# Altium PCB TMP_STM8_LCD.PcbDoc
Units mil, origin at the board's own origin, x right, y up, seen from the top; angles counter-clockwise.
Board outline 6000 x 4000 mil, 2 copper layers (Top Layer, Bottom Layer); 21 components, 16 nets, 71 pads, 27 vias.
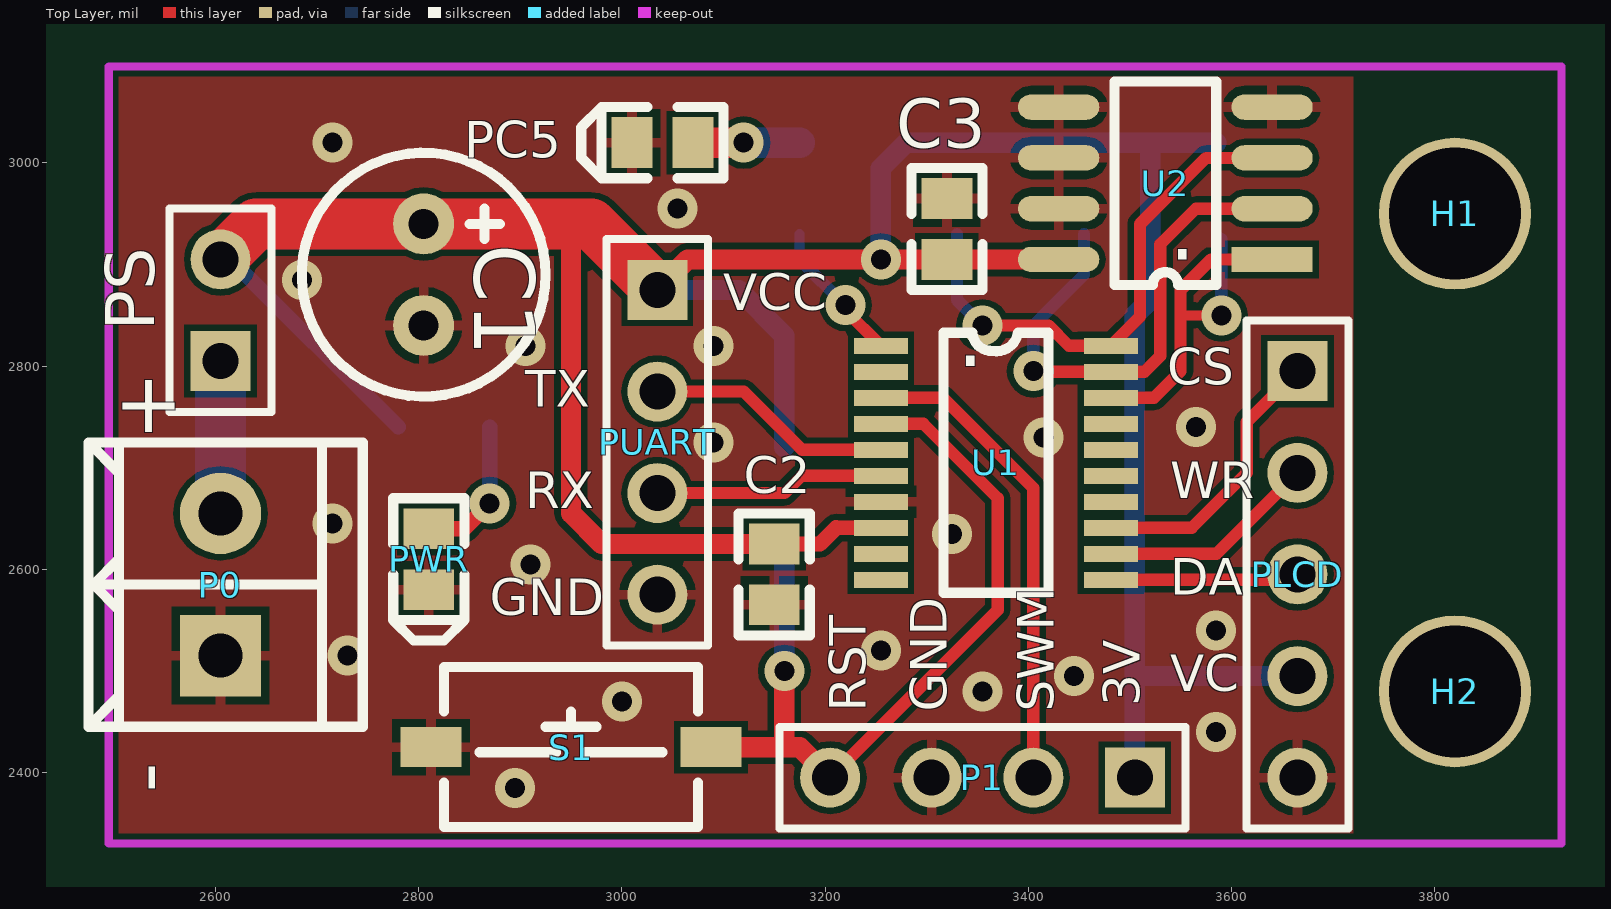
[diagram p0: Top Layer view]
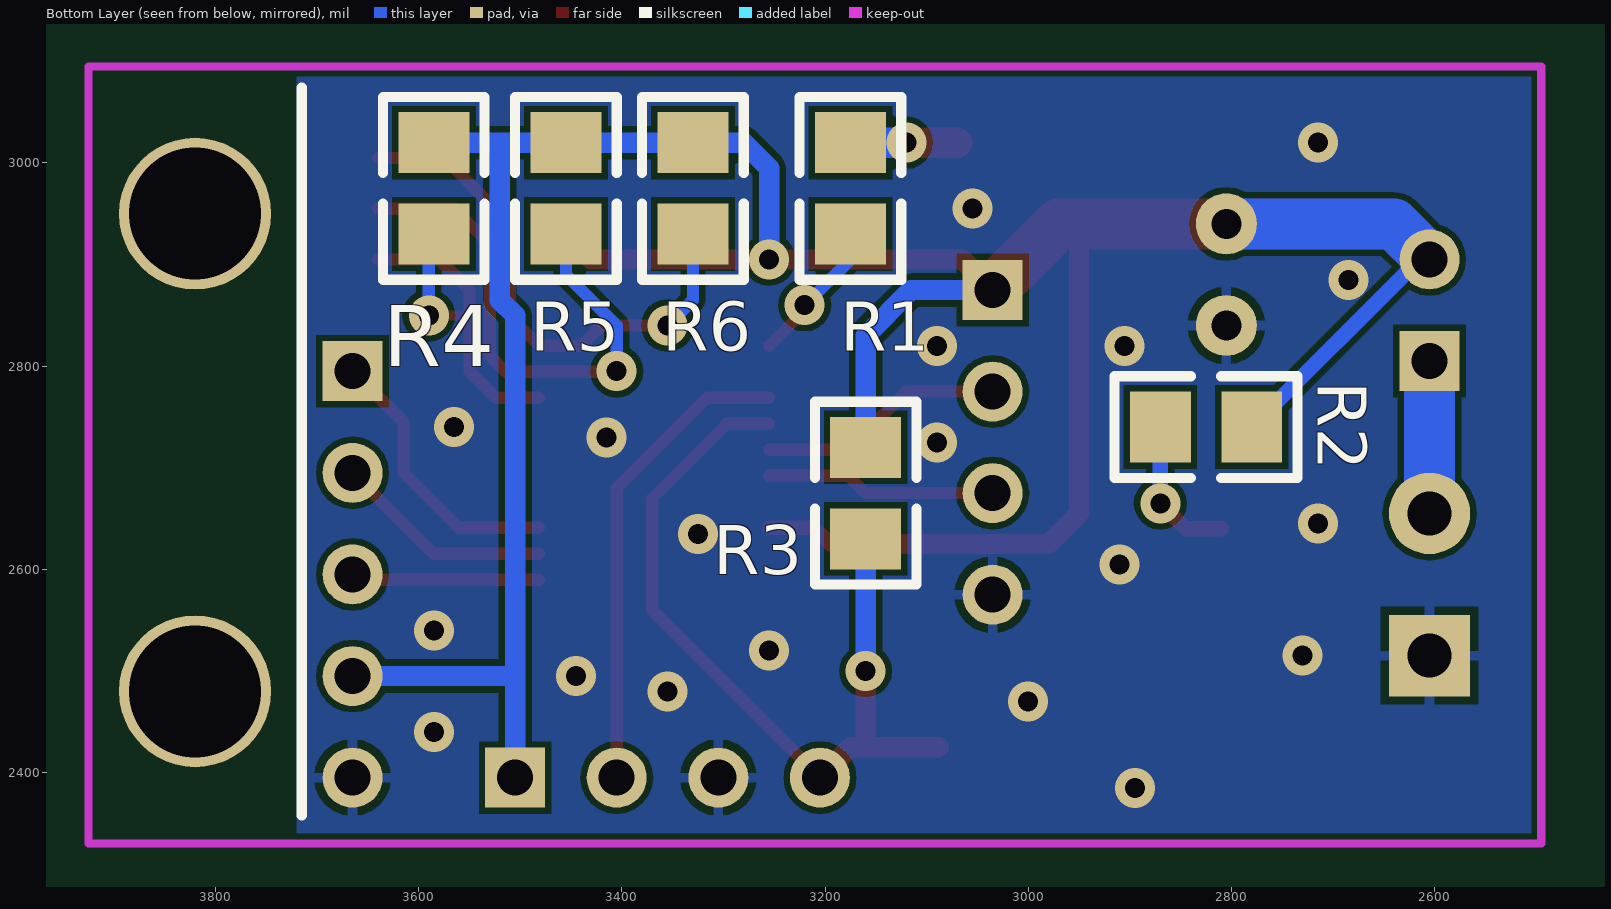
[diagram p1: Bottom Layer view, seen from below]

## Layer stack, top to bottom
Top Solder: solder mask 0.4, Solder Resist, Dk 3.5
Top Layer: signal copper 1.4
Dielectric 1: dielectric 12.6, FR-4, Dk 4.8
Bottom Layer: signal copper 1.4
Bottom Solder: solder mask 0.4, Solder Resist, Dk 3.5

## Board outline
1000,1000 7000,1000 7000,5000 1000,5000

## Design rules (kind name [scope] priority, off if disabled: settings)
Clearance [All] p1: gap=6
PolygonConnect PolygonConnect_1 [All vs IsVia] p1: connectstyle=Direct reliefconductorwidth=10 reliefentries=4 polygonreliefangle="90 Angle" airgapwidth=10
PolygonConnect [All] p2: connectstyle=Relief reliefconductorwidth=10 reliefentries=4 polygonreliefangle="90 Angle" airgapwidth=8
RoutingVias [All] p1: holewidth=23.62 width=47.24 viastyle="Through Hole" minholewidth=11.81 minwidth=23.62 maxholewidth=39.37 maxwidth=70.87
SolderMaskExpansion [All] p1: expansion=4
Width [All] p1: maxlimit=100 minlimit=10 preferedwidth=10 minimp=50.000000 maximp=50.000000 favimp=50.000000
30 further rules are at their usual default settings.

## Components (designator, comment, footprint, x,y, rotation, side; value= is the part's Value field where it differs from the comment)
C1 "Cap Pol2" CapPol5_11 2805,2890 r270 top
C2 "Cap" 0603_LMH 3150,2595 r90 top
C3 "Cap" 0603_LMH 3320,2935 r270 top
H1 "Plug" OriginHole#1 3830,2725 r0 top
H2 "Plug" OriginHole#2 3820,2485 r0 top
P0 "Header 2" KF350-2P 2605,2585 r90 top
P1 "Header 4" HDR1X4 3505,2395 r180 top
PC5 "LED" 0603_LMH 3040,3020 r180 top (schematic designator D1)
PLCD "Header 5" HDR1X5 3665,2795 r270 top
PS "Header 2" HDR1X2 2605,2805 r90 top
PUART "Header 4" HDR1X4 3035,2875 r270 top
PWR "LED" 0603_LMH 2810,2610 r270 top (schematic designator D2)
R1 "Res2" 0805 3175,2975 r270 bottom
R2 "Res2" 0805 2825,2740 r180 bottom
R3 "Res2" 0805 3160,2675 r90 bottom
R4 "Res2" 0805 3585,2975 r90 bottom
R5 "Res2" 0805 3455,2975 r90 bottom
R6 "Res2" 0805 3330,2975 r90 bottom
S1 "SW-PB" SW-3X6X2.5 2950,2425 r0 top
U1 "STM8L051F3" TSSOP20 3255,2820 r0 top
U2 "LM75" SOP8 3640,2905 r180 top

## Footprints (in the part's own frame and the unit in brackets; to place one, negate y for a bottom-side part, rotate by r counter-clockwise, add the part's x,y. Pads: shape width x height; smd on the part's side, far side on the other; paste and mask are expansions set on the pad)
0603_LMH [mil]
  rect 40x50 smd: 1(-30,0) 2(30,0)
  silkscreen extent -60,-35 60,35
0805 [mil]
  rect 60x70 smd: 1(-45,0) 2(45,0)
  silkscreen extent -90,-50 90,50
CapPol5_11 [mil] "Cap Pol 5*11mm"
  round 60 hole 29.53: 1(-50,0) 2(50,0)
  silkscreen extent -120,-120 120,120
HDR1X2 [mm] "Connector; Header; 2 Position"
  rect 1.5x1.5 hole 0.9: 1(0,0)
  round 1.5 hole 0.9: 2(2.54,0)
  silkscreen extent -1.27,-1.27 3.81,1.27
HDR1X4 [mm] "Connector; Header; 4 Position"
  rect 1.5x1.5 hole 0.9: 1(0,0)
  round 1.5 hole 0.9: 2(2.54,0) 3(5.08,0) 4(7.62,0)
  silkscreen extent -1.27,-1.27 8.89,1.27
HDR1X5 [mm] "Connector; Header; 5 Position"
  rect 1.5x1.5 hole 0.9: 1(0,0)
  round 1.5 hole 0.9: 2(2.54,0) 3(5.08,0) 4(7.62,0) 5(10.16,0)
  silkscreen extent -1.27,-1.27 11.43,1.27
KF350-2P [mil]
  rect 80x80 hole 43.31: 1(-70,0)
  round 80 hole 43.31: 2(70,0)
  silkscreen extent -140,-140 140,130
OriginHole#1 [mm]
  round 3.8 hole 3.3: 0(-0.254,5.715)
OriginHole#2 [mm]
  round 3.8 hole 3.3: 0(0,-0.127)
SOP8 [mil]
  rect 80x25 smd: 1(0,0)
  oval 80x25 smd: 2(0,-50) 3(0,-100) 4(0,-150) 5(210,-150) 6(210,-100) 7(210,-50) 8(210,0)
  silkscreen extent 55,-175 155,25
SW-3X6X2.5 [mm]
  rect 1.524x1 smd: 1(-3.5,0) 2(3.5,0)
  silkscreen extent -3.17,-2 3.17,2
TSSOP20 [mm]
  rect 1.35x0.4 smd: 1(0,0) 2(0,-0.65) 3(0,-1.3) 4(0,-1.95) 5(0,-2.6) 6(0,-3.25) 7(0,-3.9) 8(0,-4.55) 9(0,-5.2) 10(0,-5.85) 11(5.75,-5.85) 12(5.75,-5.2) 13(5.75,-4.55) 14(5.75,-3.9) 15(5.75,-3.25) 16(5.75,-2.6) 17(5.75,-1.95) 18(5.75,-1.3) 19(5.75,-0.65) 20(5.75,0)
  silkscreen extent 1.56,-6.18 4.19,0.33

## Part data
C1: "Polarized Capacitor (Axial)"
C2 C3: "Capacitor"
P0 PS: "Header, 2-Pin"
P1 PUART: "Header, 4-Pin"
PC5 PWR: library part LED0, "Typical INFRARED GaAs LED"
PLCD: "Header, 5-Pin"
R1 R2 R3 R4 R5 R6: "Resistor"
S1: "Switch"

## Via types
v1: diameter 39.37, hole 19.68, Top Layer to Bottom Layer, 27 vias

## Nets (pads, with @x,y where several pads share a name; then routed paths per layer and width w, separated by ;. In a path a pad name is that pad's centre, name@x,y a point inside that pad or via, vN(x,y) a via of type N, cw(c..) or ccw(c..) an arc to the next point about the centre after c; other vN are vias at no path point)
CS: PLCD.1 U1.13 | length 276.8
  Top Layer w12: U1.13 3560.87,2640.87 3615,2695 3615,2745 PLCD.1
DA: PLCD.3 U1.11 | length 185.8
  Top Layer w10: PLCD.3@3659.68,2589.68 PLCD.3
  Top Layer w12: U1.11 PLCD.3@3659.68,2589.68
GND: C1.2 C2.1 C3.1 P0.1 P1.3 PC5.2 PLCD.5 PUART.4 PWR.2 S1.1 U1.7 U2.4 U2.5 U2.6 U2.7
  other v1: 2895,2385 3585,2440 3000,2470 3355,2480 3445,2495 2730,2515 3255,2520 3585,2540 2910,2605 3325,2635 2715,2645 3090,2725 3415,2730 3565,2740 2905,2820 3090,2820 2685,2885 3055,2955 2715,3020
NetD1_1: PC5.1 R1.1 | length 105
  Top Layer w30: PC5.1 v1(3120,3020)
  Bottom Layer w30: v1(3120,3020) R1.1
NetD2_1: PWR.1 R2.1 | length 145.4
  Top Layer w15: PWR.1 2845,2640 v1(2870,2665)
  Bottom Layer w15: v1(2870,2665) R2.1
NetP0_2: P0.2 PS.1 | length 150
  Bottom Layer w50: P0.2 PS.1
NetR4_1: R4.1 U1.18 U2.1 | length 384
  Top Layer w10: 3550,2850 v1(3590,2850)
  Top Layer w12: U1.18 3523.82,2768.82 3550,2795 3550,2850 3550,2875 3580,2905 U2.1
  Bottom Layer w10: R4.1 R4.1@3590,2925
  Bottom Layer w12: v1(3590,2850) R4.1@3590,2925
NetR5_1: R5.1 U1.19 U2.2 | length 521.1
  Top Layer w12: v1@3405.59,2794.41 U1.19 3514.41,2794.41 3530,2810 3530,2920 3565,2955 U2.2
  Bottom Layer w12: v1(3405,2795) 3405,2840 3455,2890 R5.1
NetR6_1: R6.1 U1.20 U2.3 | length 523.8
  Top Layer w12: v1(3355,2840) 3420,2840 3440,2820 U1.20 3510,2848.62 3510,2940 3575,3005 U2.3
  Bottom Layer w12: R6.1 3330,2865 v1(3355,2840)
NRST: P1.4 R3.1 S1.2 U1.4 | length 823.3
  Top Layer w12: P1.4 3370,2560 3370,2670 3296.77,2743.23 U1.4
  Top Layer w20: S1.2 3160,2425 ; v1(3160,2500) 3160,2425 ; P1.4 3175,2425 3160,2425
  Bottom Layer w20: v1(3160,2500) R3.1
PC5: R1.2 U1.1 | length 143.1
  Top Layer w10: v1@3220,2855 v1(3220,2860)
  Top Layer w12: v1@3220,2855 U1.1
  Bottom Layer w10: R1.2@3175,2905 R1.2
  Bottom Layer w12: R1.2@3175,2905 v1(3220,2860)
SWIM: P1.2 U1.3 | length 471.8
  Top Layer w12: U1.3 3316.18,2768.82 3405,2680 P1.2
UART_RX: PUART.3 U1.6 | length 227.1
  Top Layer w12: PUART.3 3160,2675 3177.05,2692.05 U1.6
UART_TX: PUART.2 U1.5 | length 243.8
  Top Layer w12: PUART.2 3120,2775 3177.36,2717.64 U1.5
VCC: C1.1 C2.2 C3.2 P1.1 PLCD.4 PS.2 PUART.1 R2.2 R3.2 R4.2 R5.2 R6.2 U1.8 U2.8 | length 3420.9
  Top Layer w14: 3210.87,2640.87 U1.8
  Top Layer w15: C2.2 3195,2625 3210.87,2640.87
  Top Layer w20: 2950,2940 2950,2655 2980,2625 C2.2 ; PUART.1 3065,2905 v1(3255,2905) C3.2 U2.8
  Top Layer w50: PS.2 2640,2940 C1.1 2950,2940 2970,2940 PUART.1
  Bottom Layer w10: PS.2 PS.2@2615,2905
  Bottom Layer w15: PS.2@2615,2905 R2.2
  Bottom Layer w20: PUART.1 3115,2875 3160,2830 R3.2 ; v1(3255,2905) 3255,2995 3280,3020 R6.2 R5.2 3520,3020 ; P1.1 3505,2495 ; R4.2 3520,3020 ; PLCD.4 3505,2495 ; 3505,2495 3505,2850 3520,2865 3520,3020
  Bottom Layer w50: PS.2 2640,2940 C1.1
WR: PLCD.2 U1.12 | length 216.6
  Top Layer w12: U1.12 3585.28,2615.28 PLCD.2
pads on no net: H1.0 H2.0 U1.2 U1.9 U1.10 U1.14 U1.15 U1.16 U1.17

## Polygon pours and split planes (outlines as drawn)
GND on Top Layer "BottomGND" (solid, pour order 6): 2505,3085 3720,3085 3720,2340 2505,2340
GND on Bottom Layer "BottomGND" (solid, pour order 8): 2505,3085 2505,2340 3720,2340 3720,3085

## Keep-outs
Keep-Out Layer:
  lines w8: 2495,2330 3925,2330 3925,3095 2495,3095 2495,2330

## Silkscreen, mask and mechanical layers (free items; w line width, h text height)
Top Overlay:
  lines w10: 2775,2550 2795,2530 2825,2530 2845,2550 ; 2980,2985 2960,3005 2960,3035 2980,3055
  text "VCC" at 3100,2855 h36
  text "CS" at 3536.91,2781.91 h36
  text "TX" at 2905,2760 h36
  text "+" at 2500,2735 h60
  text "WR" at 3540,2670 h36
  text "RX" at 2905,2660 h36
  text "DA" at 3540,2575 h36
  text "GND" at 2870,2555 h36
  text "VC" at 3540,2480 h36
  text "3V" at 3510,2465 h36 r90
  text "RST" at 3240,2460 h36 r90
  text "GND" at 3320,2460 h36 r90
  text "SWM" at 3425,2460 h36 r90
  text "-" at 2560,2380 h60 r90
Bottom Overlay:
  lines w10: 3715,2357.81 3715,3074.31